# EAGLE board power_tower_mast_routed (EAGLE 6.5.0)
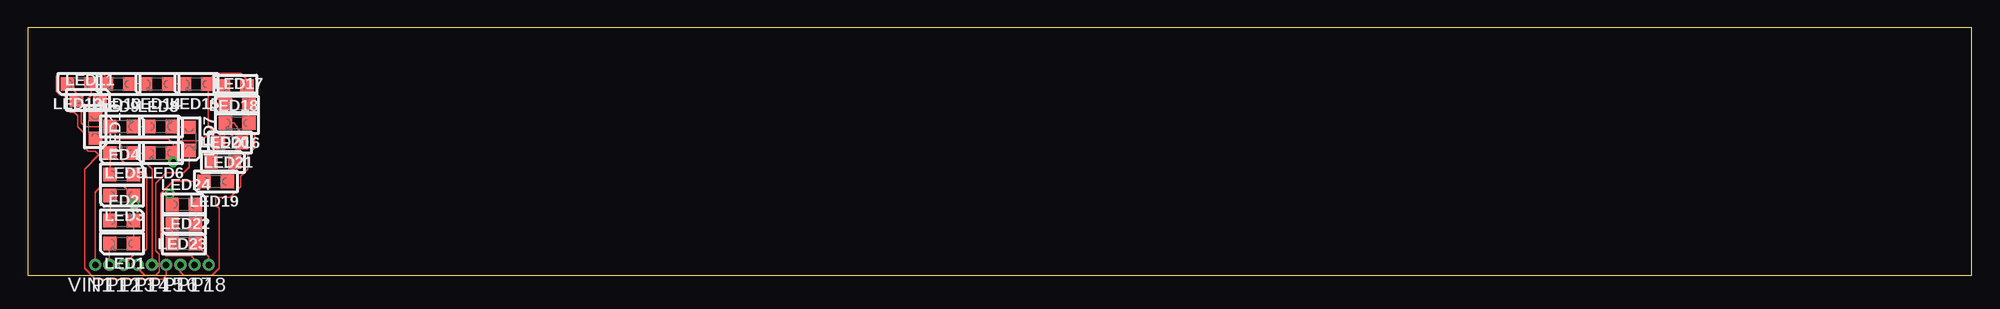
[diagram p0: board, top side]
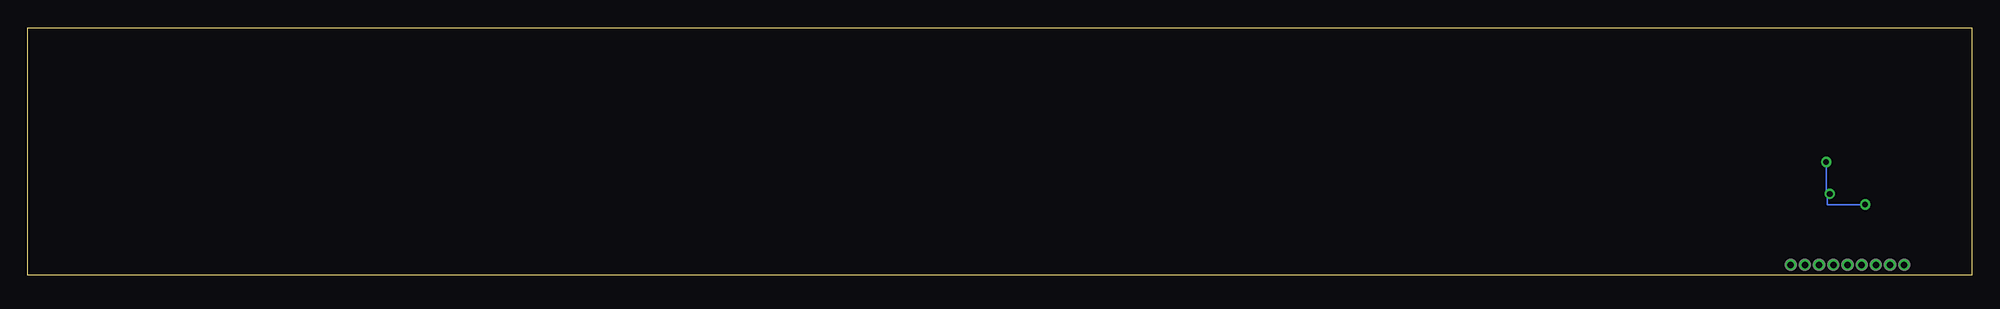
[diagram p1: board, bottom side, seen from below]

Size 174.06 x 22.16 mm. Coordinates in mm from the lower left corner, seen from the top.
Outline: 0,0 174.06,0 174.06,22.16 0,22.16 0,0
Copper layers (1*16): Top 0.035mm / dielectric 1.5mm / Bottom 0.035mm
Design rules "default": minimum track width 10mil, minimum drill 24mil, track to track 8mil, track to pad 8mil, pad to pad 8mil, via to via 8mil, smd to smd 8mil, copper to edge 40mil, drill to drill 8mil, minimum pad ring 10mil, minimum via ring 8mil, stop-mask expansion 4mil, vias tented up to drill 0mil, thermal gap 10mil

## Footprints (pad centres in the part's own frame; a part is rotated, then mirrored left to right if it is on the bottom)
LED_0805 = smd 1.2 x 1.2: A 0,-1.05; C 0,1.05
P1-20 = drill 0.584: TP 0,0

## Placement (x,y rotation side)
LED1  [LED_0805]  8.41,2.86 90 top
LED2  [LED_0805]  8.41,4.92 270 top
LED3  [LED_0805]  8.41,7.14 90 top
LED4  [LED_0805]  8.41,9.05 270 top
LED5  [LED_0805]  8.41,10.95 90 top
LED6  [LED_0805]  11.91,10.95 90 top
LED7  [LED_0805]  14.45,12.22 180 top
LED8  [LED_0805]  11.91,13.34 270 top
LED9  [LED_0805]  8.41,13.34 270 top
LED10  [LED_0805]  6.03,13.34 180 top
LED11  [LED_0805]  5.4,15.72 270 top
LED12  [LED_0805]  4.6,17.15 90 top
LED13  [LED_0805]  8.1,17.15 90 top
LED14  [LED_0805]  11.59,17.15 90 top
LED15  [LED_0805]  15.08,17.15 90 top
LED16  [LED_0805]  18.73,13.65 90 top
LED17  [LED_0805]  18.73,15.4 270 top
LED18  [LED_0805]  18.57,16.99 90 top
LED19  [LED_0805]  16.83,8.41 90 top
LED20  [LED_0805]  17.46,10.16 270 top
LED21  [LED_0805]  18.1,11.91 90 top
LED22  [LED_0805]  13.97,2.86 270 top
LED23  [LED_0805]  13.97,4.6 90 top
LED24  [LED_0805]  13.97,6.35 270 top
P11  [P1-20]  7.3,0.95 180 top
P12  [P1-20]  8.57,0.95 180 top
P13  [P1-20]  9.84,0.95 180 top
P14  [P1-20]  11.11,0.95 180 top
P15  [P1-20]  12.38,0.95 180 top
P16  [P1-20]  13.65,0.95 180 top
P17  [P1-20]  14.92,0.95 180 top
P18  [P1-20]  16.19,0.95 180 top
VIN1  [P1-20]  6.03,0.95 180 top

## Library data of the parts
LED1-LED24 P11-P18 VIN1 = CyberRailGuru

## Nets
N$1: LED1.A LED2.C
N$2: LED2.A LED3.C
N$5: LED4.A LED5.C
N$6: LED5.A LED6.C
N$9: LED7.A LED8.C
N$10: LED8.A LED9.C
N$13: LED10.A LED11.C
N$14: LED11.A LED12.C
N$17: LED13.A LED14.C
N$18: LED14.A LED15.C
N$21: LED16.A LED17.C
N$22: LED17.A LED18.C
N$25: LED19.A LED20.C
N$26: LED20.A LED21.C
N$29: LED22.A LED23.C
N$30: LED23.A LED24.C
VIN: LED3.A LED6.A LED9.A LED12.A LED15.A LED18.A LED21.A LED24.A VIN1.TP
VOUT1: LED1.C P11.TP
VOUT2: LED4.C P12.TP
VOUT3: LED7.C P13.TP
VOUT4: LED10.C P14.TP
VOUT5: LED13.C P15.TP
VOUT6: LED16.C P16.TP
VOUT7: LED19.C P17.TP
VOUT8: LED22.C P18.TP

## Tracks (layer width: path | path; a pad name or v marks a point on that pad's centre or on a via)
N$1
  Top 0.152: LED1.A LED2.C
N$2
  Top 0.152: LED2.A LED3.C
N$5
  Top 0.152: LED4.A LED5.C
N$6
  Top 0.152: LED5.A LED6.C
N$9
  Top 0.152: LED7.A 13.02,13.27 LED8.C
N$10
  Top 0.152: LED8.A LED9.C
N$13
  Top 0.152: LED10.A 6.03,15.3 LED11.C
N$14
  Top 0.152: LED11.A 4.35,16.35 LED12.C
N$17
  Top 0.152: LED13.A LED14.C
N$18
  Top 0.152: LED14.A LED15.C
N$21
  Top 0.152: LED17.C LED16.A
N$22
  Top 0.152: LED18.C 17.52,15.56 LED17.A
N$25
  Top 0.152: LED20.C 18.51,9.62 18.1,9.21 18.1,8.63 LED19.A
N$26
  Top 0.152: LED21.C 17.05,11.65 16.51,11.11 16.51,10.26 LED20.A
N$29
  Top 0.152: LED23.C LED22.A
N$30
  Top 0.152: LED24.C LED23.A
VIN  (via drill 0.5)
  Top 0.152: LED12.A 5.65,16.13 5.4,15.88 5.4,15.24 4.76,14.61 4.76,13.65 5.08,13.34 LED9.A 7.36,12.64 7.78,12.22 12.54,12.22 13.02,11.75 13.02,11.02 LED6.A | LED18.A 19.62,17.52 19.05,18.1 16.83,18.1 16.51,17.78 16.51,17.52 LED15.A 16.13,13.4 16.51,13.02 | 16.51,13.02 16.67,12.86 17.94,12.86 18.57,12.22 18.83,12.22 LED21.A | LED6.A 12.96,11.37 13.65,12.07 15.56,12.07 16.51,13.02 | VIN1.TP 6.03,7.46 6.67,8.1 8.51,8.1 LED3.A 9.46,6.41 v9.53,6.35 | v12.7,7.3 12.7,6.57 LED24.A | LED6.A 12.96,10.22 v13.02,10.16
  Bottom 0.152: v9.53,6.35 LED24.A 12.92,7.08 v12.7,7.3 13.02,7.62 v13.02,10.16
VOUT1
  Top 0.152: P11.TP 7.3,2.8 LED1.C
VOUT2
  Top 0.152: LED4.C 10.64,9.05 10.64,2.38 10.16,1.91 9.53,1.91 P12.TP
VOUT3
  Top 0.152: LED7.C 14.45,9.68 13.97,9.21 12.38,9.21 12.06,8.89 11.43,8.26 11.43,2.22 11.75,1.91 11.75,0.32 11.43,0 10.48,0 9.84,0.64 P13.TP
VOUT4
  Top 0.152: P14.TP 11.11,9.53 10.64,10 8.73,10 8.41,10.32 8.41,11.59 8.1,11.91 6.41,11.91 LED10.C
VOUT5
  Top 0.152: LED13.C 7.05,17.72 6.67,18.1 2.86,18.1 2.54,17.78 2.54,16.51 2.86,16.19 3.17,16.19 3.49,15.88 3.49,14.92 3.81,14.61 4.13,14.61 4.45,14.29 4.45,13.34 5.08,12.7 5.08,11.43 5.4,11.11 6.03,11.11 6.35,10.8 5.08,9.53 5.08,0.64 6.03,-0.32 12.06,-0.32 12.38,0 P15.TP
VOUT6
  Top 0.152: LED16.C 18.41,13.65 18.73,13.34 18.73,13.18 19.05,12.86 20,12.86 20.32,12.54 20.32,11.43 19.68,10.8 19.68,9.53 19.05,8.89 19.05,7.94 18.1,6.99 16.83,6.99 16.83,6.35 17.14,6.03 17.14,0.64 16.51,0 13.97,0 13.65,0.32 P16.TP
VOUT7
  Top 0.152: P17.TP 14.92,1.43 14.61,1.75 12.38,1.75 11.91,2.22 11.91,7.3 13.02,8.41 LED19.C
VOUT8
  Top 0.152: P18.TP 16.19,1.69 LED22.C